# Altium PCB CP17E0276.PcbDoc (part 1 of 2)
Units mil, origin at the board's own origin, x right, y up, seen from the top; angles counter-clockwise.
Board outline 1745 x 3124.58 mil, 4 copper layers (Top Layer, Signal Layer 1, Signal Layer 2, Bottom Layer), stack 63.668 mil thick; 133 components, 83 nets, 411 pads, 139 vias.
Unrouted connection lines stored in the file: 11.
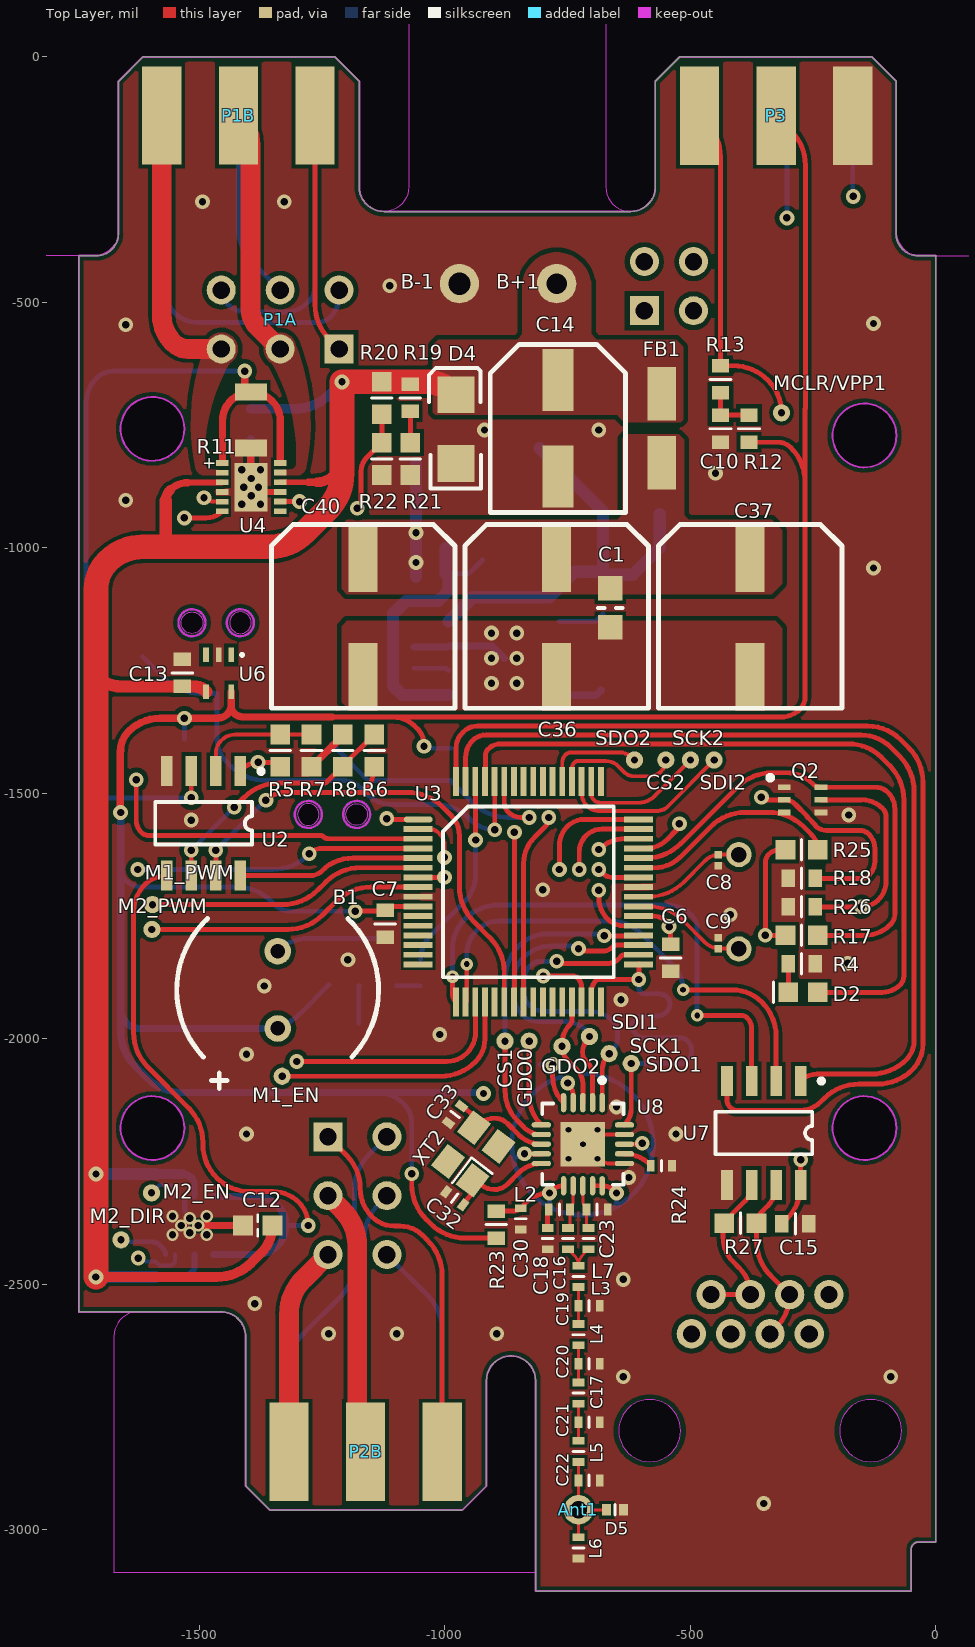
[diagram p0: Top Layer view]
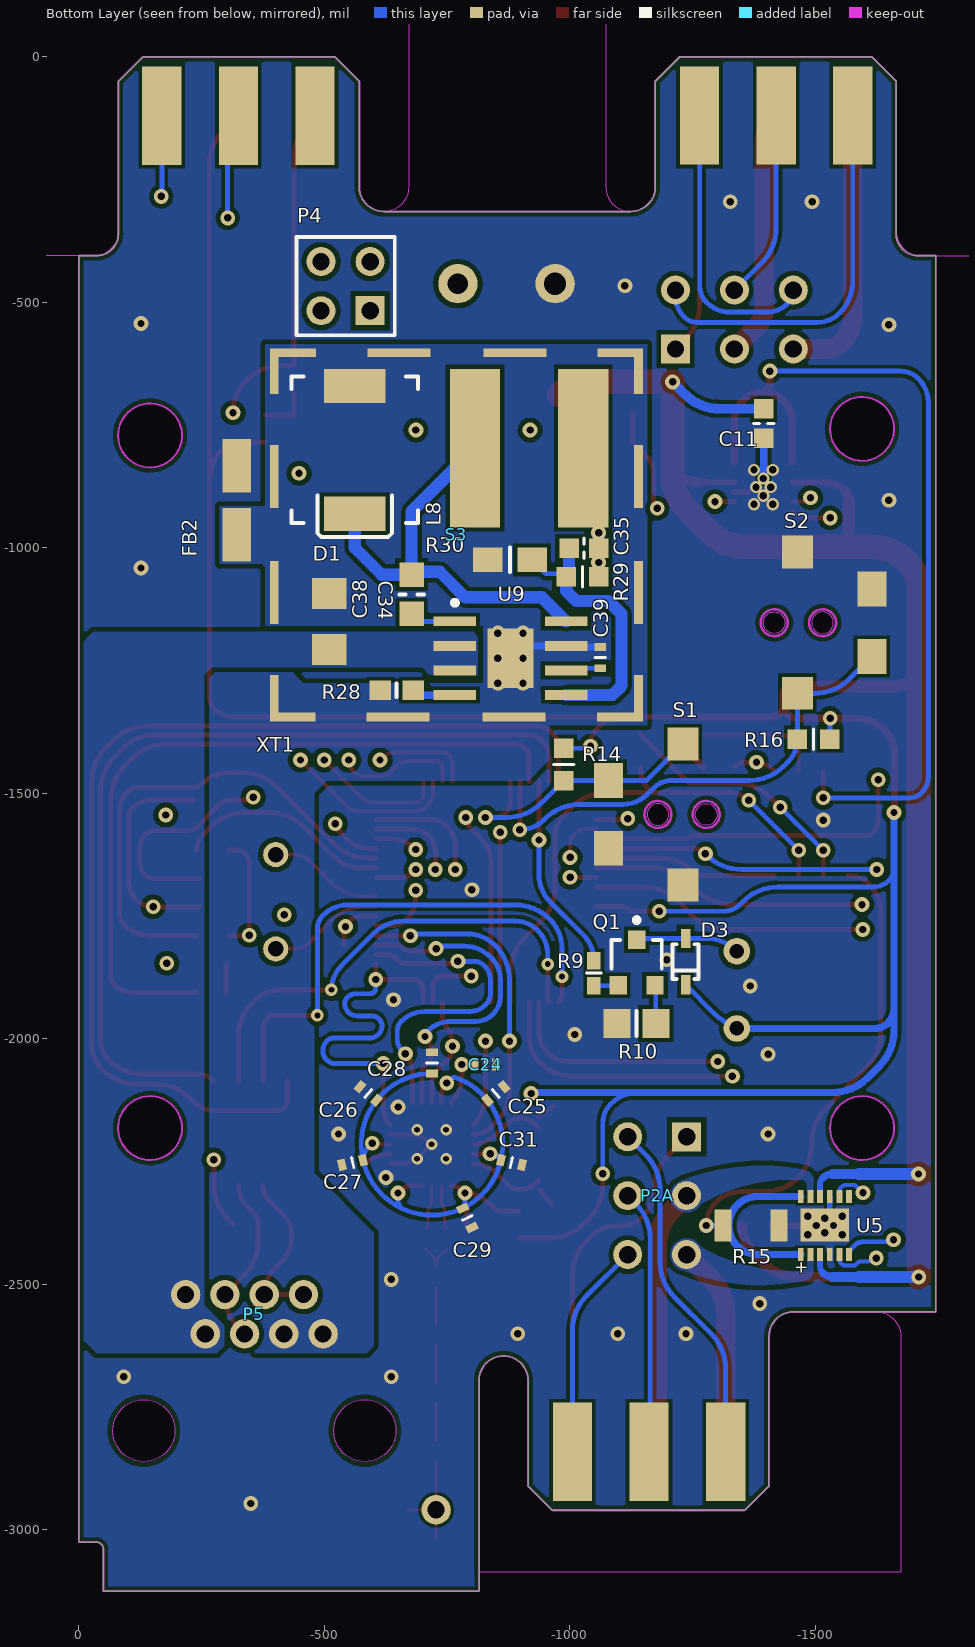
[diagram p1: Bottom Layer view, seen from below]
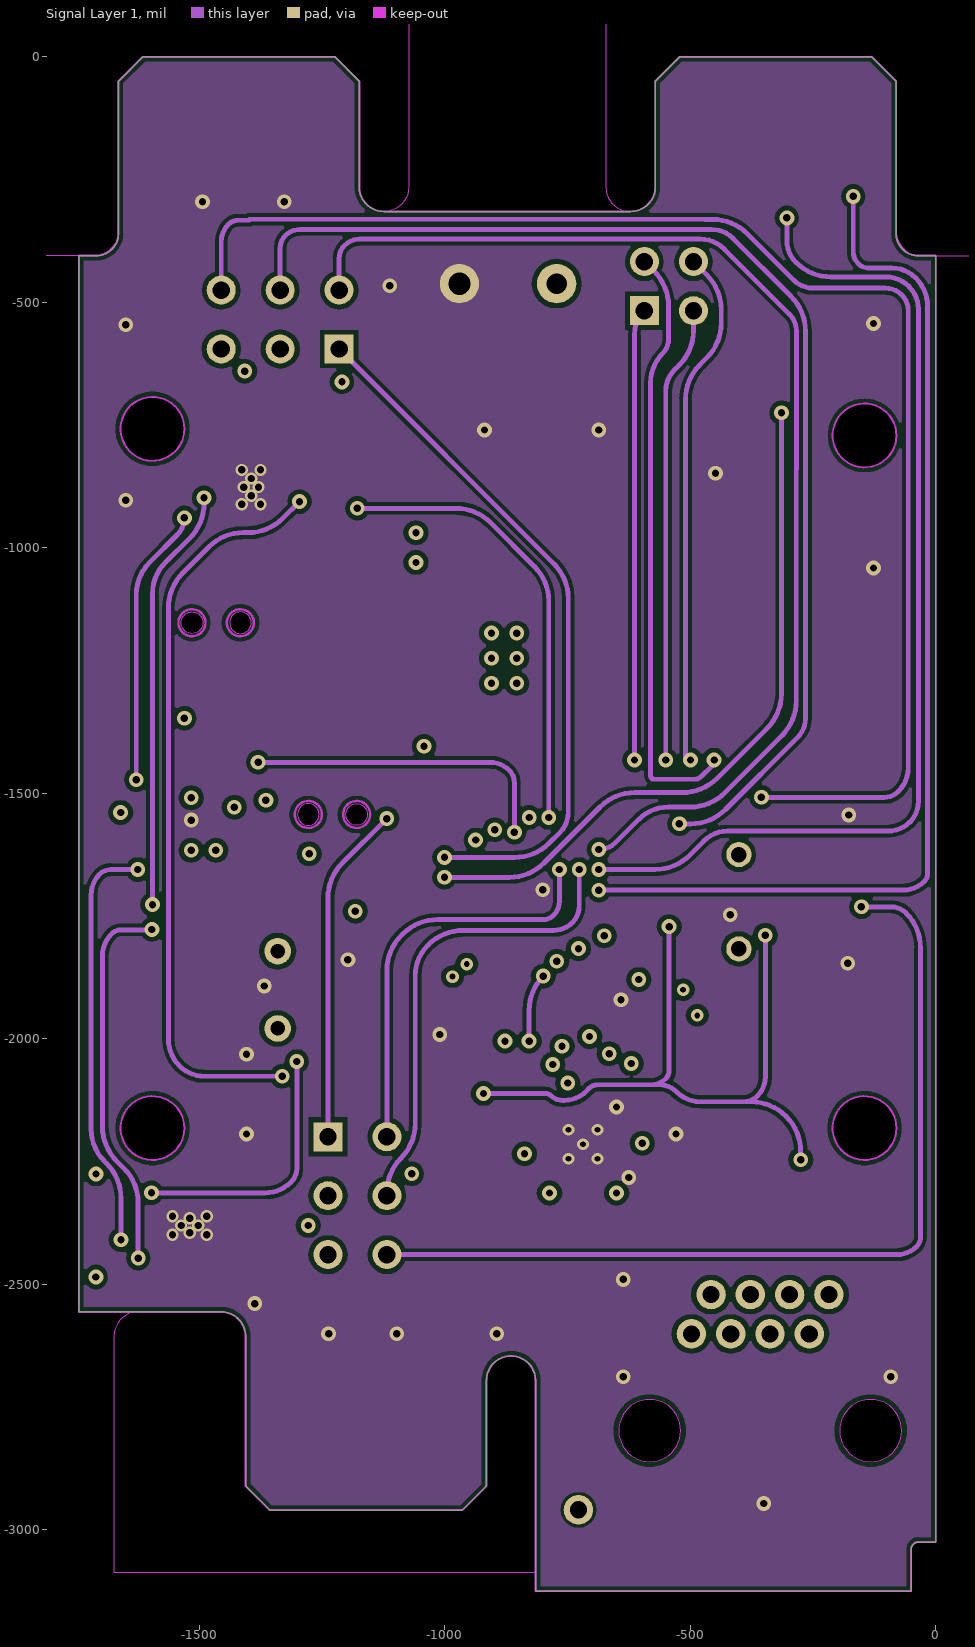
[diagram p2: Signal Layer 1]
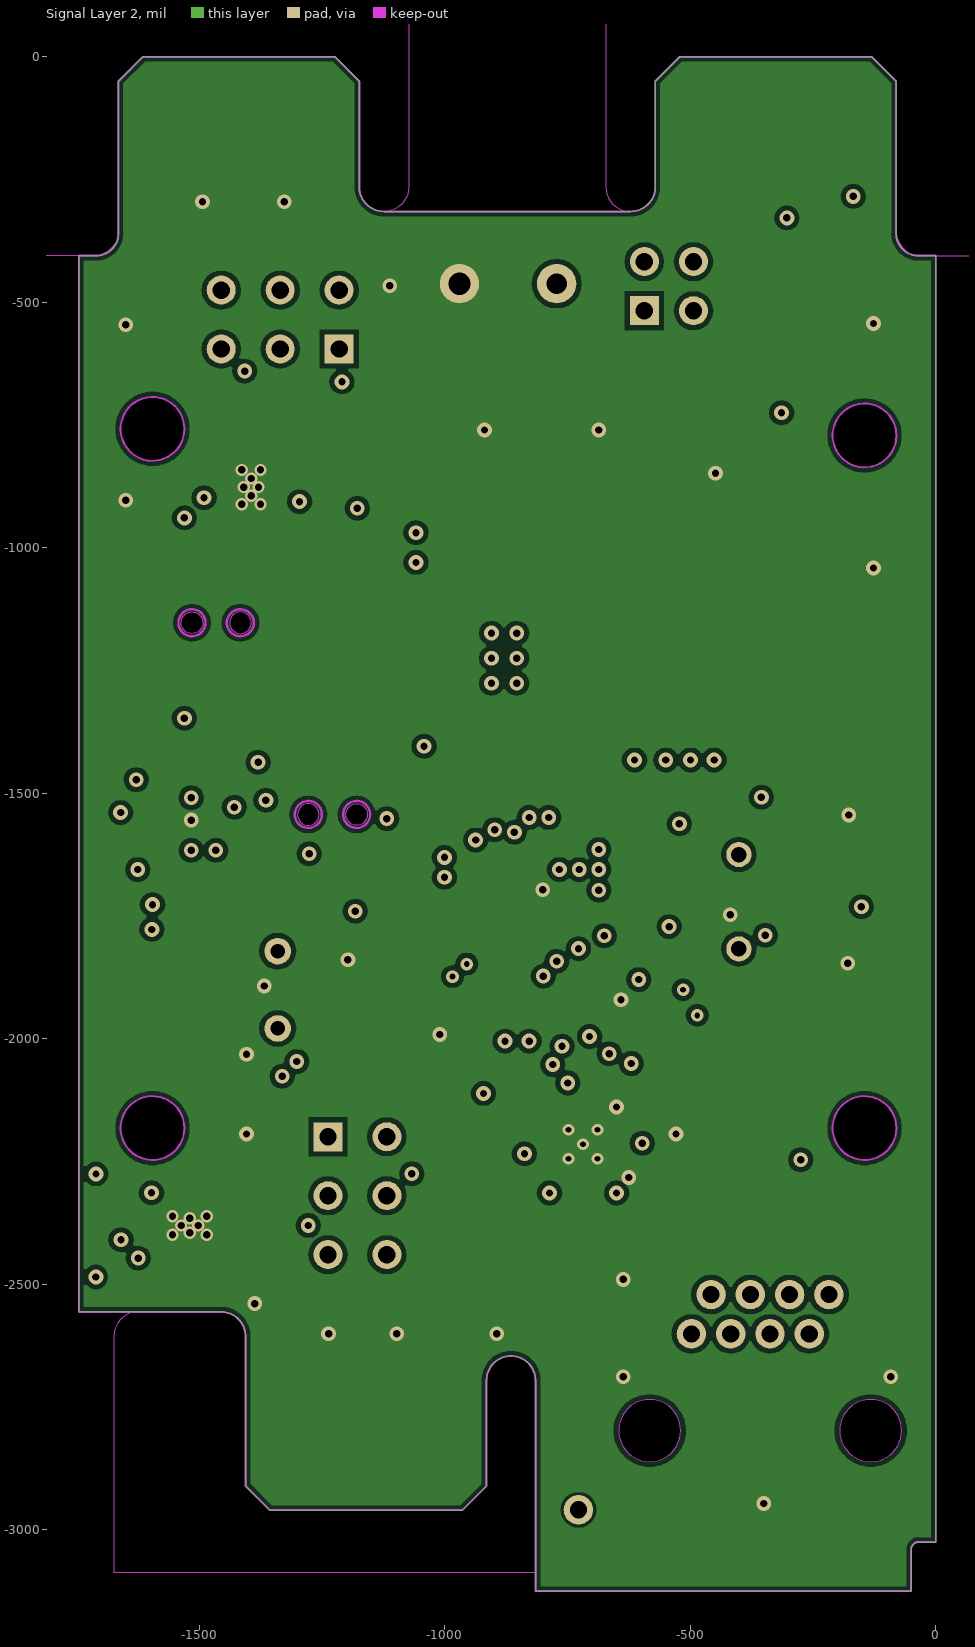
[diagram p3: Signal Layer 2]

## Layer stack, top to bottom
Top Solder: solder mask 0.4, Solder Resist, Dk 3.5
Top Layer: signal copper 1.417
Dielectric 1: prepreg 7, 2116, Dk 4.2
Signal Layer 1: signal copper 1.417
Dielectric 2: core 44, FR-4, Dk 4.2
Signal Layer 2: signal copper 1.417
Dielectric 3: prepreg 7, 2116, Dk 4.2
Bottom Layer: signal copper 1.417
Bottom Solder: solder mask 0.4, Solder Resist, Dk 3.5

## Board outline
-1745,-2555.69 -1745,-405 -1709.55,-405 ccw(c-1709.55,-359.69) -1664.23,-359.69 -1664.24,-359.69 -1664.24,-49.84 -1614.39,0 -1223.61,0 -1173.76,-49.84 -1173.76,-271.35 ccw(c-1123.5,-264.23) -1123.5,-315 -621.48,-315 ccw(c-621.48,-264.23) -571.22,-271.35 -571.22,-49.84 -521.37,0 -130.59,0 -80.75,-49.84 -80.75,-359.69 ccw(c-35.44,-359.69) -35.44,-405 0,-405 0,-3024.58 -35,-3024.58 ccw(c-35,-3039.58) -50,-3039.58 -50,-3124.58 -814.92,-3124.58 -814.92,-2695.58 ccw(c-864.92,-2695.58) -914.92,-2695.58 -914.92,-2910.58 -963.92,-2959.58 -1355.92,-2959.58 -1404.92,-2910.58 -1405.39,-2910.58 -1405.39,-2605.69 ccw(c-1455.39,-2605.69) -1455.39,-2555.69
cut-out: -1530,-2181.58 cw(c-1595,-2181.58) -1595,-2246.58 cw(c-1595,-2181.58) -1660,-2181.58 cw(c-1595,-2181.58) -1595,-2116.58 cw(c-1595,-2181.58)
cut-out: -80,-2181.58 cw(c-145,-2181.58) -145,-2246.58 cw(c-145,-2181.58) -210,-2181.58 cw(c-145,-2181.58) -145,-2116.58 cw(c-145,-2181.58)
cut-out: -1595,-692.58 cw(c-1595,-757.58) -1530,-757.58 cw(c-1595,-757.58) -1595,-822.58 cw(c-1595,-757.58) -1660,-757.58 cw(c-1595,-757.58)
cut-out: -145,-836.05 cw(c-145,-771.05) -210,-771.05 cw(c-145,-771.05) -145,-706.05 cw(c-145,-771.05) -80,-771.05 cw(c-145,-771.05)
cut-out: -645.72,-2797.58 ccw(c-582.49,-2797.58) -582.49,-2860.81 ccw(c-582.49,-2797.58) -519.26,-2797.58 ccw(c-582.49,-2797.58) -582.49,-2734.35 ccw(c-582.49,-2797.58)
cut-out: -195.71,-2797.58 ccw(c-132.48,-2797.58) -132.48,-2860.81 ccw(c-132.48,-2797.58) -69.25,-2797.58 ccw(c-132.48,-2797.58) -132.48,-2734.35 ccw(c-132.48,-2797.58)

## Design rules (kind name [scope] priority, off if disabled: settings)
Clearance Clearance_Exceptions [InComponentClass('Radio') or InComponentClass('For Pad Clearence Exemptions')] p1: gap=6
Clearance Clearance_1 [All] p2: gap=10 except(8: Arc-Arc Arc-Track Arc-SMDPad Arc-THPad Arc-Via Arc-Fill Arc-Poly Arc-Region Arc-Text Track-Track Track-SMDPad Track-Poly SMDPad-SMDPad SMDPad-THPad SMDPad-Via SMDPad-Poly THPad-THPad)
Clearance KeepOut [IsKeepOut] p3: gap=20
ComponentClearance "C1 and C36" [InComponent('C1') vs InComponent('C36')] p1: gap=-30 collisioncheckmode=3 verticalgap=100000 showdistances=FALSE
ComponentClearance ComponentClearance_1 [All] p2: gap=10 collisioncheckmode=3 verticalgap=10 showdistances=FALSE
Length Length_1 [All] p1: maxlimit=100000 minlimit=0
Length "Radio communication Length" [InNetClass('Radio Communication')] p2: maxlimit=650 minlimit=0
MatchedLengths MatchedLengths_1 [InNetClass('Radio Communication')] p1: tolerance=50 checknetsindiffpair=FALSE checkdiffpairvsdiffpair=TRUE checkxsignals=TRUE checkothers=TRUE
MaxMinImpedance [InNetClass('Ant')] p1: minimum=49.50 maximum=50.50
PolygonConnect "Buck convert" [InNet('NetC4_1') or InNet('NetC35_1') or InNet('NetC3_2') or InNet('PWRIN') or InNet('NetP1A_2') or InNet('NetP1A_3') or InNet('NetC36_2') or InNet('NetP2A_2') or InNet('NetP2A_3') or InNet('VCC') or InNet('NetC38_1')or InNet('GND') or InNet('NetC1_2') or InNet('NetC1_1')] p1: connectstyle=Direct reliefconductorwidth=10 reliefentries=4 polygonreliefangle="90 Angle" airgapwidth=10
PolygonConnect [All] p2: connectstyle=Relief reliefconductorwidth=10 reliefentries=4 polygonreliefangle="90 Angle" airgapwidth=10
PolygonConnect PolygonConnect_1 [All] p3: connectstyle=Relief reliefconductorwidth=10 reliefentries=4 polygonreliefangle="90 Angle" airgapwidth=10
RoomDefinition "Buck Converter_12v" [InComponentClass('Buck Converter_12v')] p1: confinementstyle=ConfineIn formatcopy=TRUE lockcomponents=FALSE outline -1874.46,-4406.58 2453.47,-4406.58 2453.47,415.21 -1874.46,415.21
RoomDefinition Radio [InComponentClass('Radio')] p2: confinementstyle=ConfineIn formatcopy=TRUE lockcomponents=FALSE outline -1528.5,-6085.26 -223.5,-6085.26 -223.5,-1831.75 -1528.5,-1831.75
RoomDefinition Power [InComponentClass('Power')] p3: confinementstyle=ConfineIn formatcopy=TRUE lockcomponents=FALSE outline -2319,-3567.58 4456.49,-3567.58 4456.49,137.57 -2319,137.57
RoomDefinition Main [InComponentClass('Main')] p4: confinementstyle=ConfineIn formatcopy=TRUE lockcomponents=FALSE outline -2625,-3305.58 5282.94,-3305.58 5282.94,2221.57 -2625,2221.57
RoutingVias [All] p1: holewidth=15 width=30 viastyle="Through Hole" minholewidth=15 minwidth=30 maxholewidth=15 maxwidth=30
SolderMaskExpansion [All] p1: expansion=4
Width Radio_1 [InNetClass('Radio')] p1: maxlimit=50 minlimit=6 preferedwidth=6
Width [All and not InNetClass('Radio Antenna')] p2: maxlimit=50 minlimit=8 preferedwidth=10
Width "50 Ohm Width" [InNetClass('Radio Filter')] p3 off: maxlimit=25 minlimit=4 preferedwidth=8 impedancedriven=TRUE minimp=49.500000 maximp=50.500000 favimp=50.000000
29 further rules are at their usual default settings.

## Classes and differential pairs
net class "Radio Antenna": NetAnt1_1 NetC16_1 NetC16_2 NetC17_1 NetC17_2 NetC19_1 NetC23_1
net class "Radio Communication": NetC17_1 NetC19_1 NetCS1_0 NetSCK1_0 NetSDI1_0 NetSDO1_0
component class "For Pad Clearence Exemptions": U3 U4 U5
component class Radio: Ant1 C16 C17 C18 C19 C20 C21 C22 C23 C24 C25 C26 C27 C28 C29 C30 C31 C32 C33 D5 L2 L3 L4 L5 L6 L7 R23 R24 U8 XT2
component class Power: B+1 B-1 C13 C14 C15 D4 P5 R19 R20 R21 R22 R27 S3 U6 U7
component class Main: B1 BAT C6 C7 C8 C9 C10 C11 C12 CS1 CS2 D2 D3 DOWN GDO0 GDO2 M1 M1_DIR M1_EN M1_ID M1_PWM M1H1 M1H2 M1HP M2 M2_DIR M2_EN M2_ID M2_PWM M2H1 M2H2 M2HP MCLR/VPP1 P1A P1B P2A P2B P3 P4 Q1 Q2 R4 R5 R6 R7 R8 R9 R10 R11 R12 R13 R14 R15 R16 R17 R18 R25 R26 S1 S2 SCK1 SCK2 SDI1 SDI2 SDO1 SDO2 U2 U3 U4 U5 UP XT1
component class "Buck Converter_12v": C1 C34 C35 C36 C37 C38 C39 C40 D1 FB1 FB2 L8 R28 R29 R30 U9

## Components (designator, comment, footprint, x,y, rotation, side; value= is the part's Value field where it differs from the comment)
Ant1 "Antenna" "35 mil hole" -727.5,-2958.95 r90 top
B1 "Buzzer" CST-931AP -1340.12,-1900 r0 top
B+1 "Batt +" "45 mil hole"#1 -771.97,-462 r0 top
B-1 "Batt -" "45 mil hole"#2 -970,-462 r0 top
BAT "" TestPoint1 4573.28,-3065.68 r90 top
C1 "10uF" "0805 capacitor" -662.78,-1082 r270 top
C6 "0.1uF" "0603 Small" -540,-1835 r90 top
C7 "1.0uF" "0603 Small" -1121.36,-1765.48 r90 top
C8 "22pF" 0201 -442.73,-1636.11 r90 top
C9 "22pF" 0201 -442.73,-1805.11 r270 top
C10 "0.1uF" "0603 Small" -438.23,-757.33 r90 top
C11 "0.1uF" "0603 Capacitor" -1394.54,-746.78 r90 bottom
C12 "0.1uF" "0603 Capacitor" -1380.62,-2379.95 r0 top
C13 "0.1uF" "0603 Small" -1534.04,-1254.62 r90 top
C14 "100uF" ALEL_D8 -769.3,-756.54 r270 top
C15 "0.1uF" "0603 Small" -285.65,-2376.52 r180 top
C16 "3.9pF" "0402 Small" -748.79,-2406.63 r90 top
C17 "220pF" "0402 Small" -727.5,-2721.09 r270 top
C18 "220pF" "0402 Small" -790.42,-2406.63 r90 top
C19 "8.2pF" "0402 Small" -705.85,-2543.04 r0 top
C20 "5.6pF" "0402 Small" -705.85,-2661.74 r0 top
C21 "NP" "0402 Small" -705.85,-2780.44 r0 top
C22 "NP" "0402 Small" -705.85,-2899.13 r0 top
C23 "3.9pF" "0402 Small" -689.44,-2347.28 r0 top
C24 "100nF" "0402 Small" -828,-2052.09 r0 bottom
C25 "22nF" "0402 Small" -848.99,-2111.17 r321.43 bottom
C26 "22nF" "0402 Small" -589.39,-2111.17 r218.57 bottom
C27 "22nF" "0402 Small" -557.39,-2251.57 r167.14 bottom
C28 "22nF" "0402 Small" -719.19,-2048.67 r270 bottom
C29 "22nF" "0402 Small" -791.19,-2364.27 r64.29 bottom
C30 "22nF" "0402 Small" -845.45,-2366.19 r90 top
C31 "22nF" "0402 Small" -880.99,-2251.57 r12.86 bottom
C32 "12pF" "0402 Small" -979.8,-2324.63 r322.62 top
C33 "15pF" "0402 Small" -978.85,-2153.79 r52.62 top
C34 "0.1uF" "0805 capacitor" -677.58,-1054.58 r270 bottom
C35 "560pF" "0603 Capacitor" -1028.42,-1000.56 r0 bottom
C36 "270uF" APXG160ARA271MH70G -771.97,-1139.57 r0 top
C37 "270uF" APXG160ARA271MH70G -377.95,-1139.57 r0 top
C38 "1uF" "1206 - duplicate" -510,-1150 r90 bottom
C39 "8.2nF" "0402 Small" -1062.1,-1223.39 r90 bottom
C40 "270uF" APXG160ARA271MH70G -1166,-1139.57 r0 top
CS1 "" TestPoint1 -877.06,-2004.43 r90 top
CS2 "" TestPoint1 -549.69,-1432 r90 top
D1 "STPS2L30A" SMC -562,-800.23 r270 bottom
D2 "BLUE" "0603 LED" -270,-1905.04 r180 top
D3 "" "SOD-323, SD-76" -1235.7,-1842.54 r90 bottom
D4 "SMAJ20" sma+ -977.05,-758.04 r90 top
D5 "ESD" XDFN2 -653.24,-2958.95 r180 top
DOWN "" TestPoint1 3394.28,-3065.68 r90 top
FB1 "Ferrite 0.75mOhm" "2-SMD, J-LEAD" -558.16,-756.54 r90 top
FB2 "Ferrite 0.75mOhm" "2-SMD, J-LEAD" -321.55,-903 r90 bottom
GDO0 "" TestPoint1 -828.06,-2004.43 r90 top
GDO2 "" TestPoint1 -761,-2015.05 r90 top
L2 "27nH" "0402 Small" -766.5,-2347.28 r0 top
L3 "22nH" "0402 Small" -727.5,-2483.69 r270 top
L4 "27nH" "0402 Small" -727.5,-2602.39 r270 top
L5 "NP" "0402 Small" -727.5,-2839.78 r270 top
L6 "Inductor" "0402 Small" -727.5,-3036.49 r90 top
L7 "27nH" "0402 Small" -707.15,-2406.63 r270 top
L8 "3.3uH" "SRN8040 - Power Inductor" -917,-796.73 r180 bottom
M1 "" TestPoint1 4423.28,-3065.68 r0 top
M1_DIR "" TestPoint1 1064.28,-3075.68 r90 top
M1_EN "" TestPoint1 -1331,-2076 r90 top
M1_ID "" TestPoint1 1794.28,-3075.68 r90 top
M1_PWM "" TestPoint1 -1595,-1726.46 r90 top
M1H1 "" TestPoint1 2404.28,-3065.68 r90 top
M1H2 "" TestPoint1 2124.28,-3065.68 r90 top
M1HP "" TestPoint1 3973.28,-3065.68 r90 top
M2 "" TestPoint1 4253.28,-3065.68 r0 top
M2_DIR "" TestPoint1 -1659.12,-2409 r90 top
M2_EN "" TestPoint1 -1597,-2313.49 r90 top
M2_ID "" TestPoint1 1454.28,-3075.68 r90 top
M2_PWM "" TestPoint1 -1596.18,-1777 r90 top
M2H1 "" TestPoint1 2954.28,-3065.68 r90 top
M2H2 "" TestPoint1 2664.28,-3065.68 r90 top
M2HP "" TestPoint1 3683.28,-3065.68 r90 top
MCLR/VPP1 "" TestPoint1 -314,-724.89 r90 top
P1A "M1" "2X3 Header (For track drapery)" -1335,-535 r180 top
P1B "Header 6" "Track Edge Connector"#1 -1173.82,-49.84 r180 top locked
P2A "M2a" "2X3 Header (For track drapery)" -1177.67,-2319.21 r270 bottom
P2B "Header 6" "Track Edge Connector"#2 -914.92,-2910.58 r180 top locked
P3 "Header 6" "Track Edge Connector"#2 -571.16,-49.9 r0 top locked
P4 "SPI2" HDR2X2 -593.25,-517 r90 bottom
P5 "RJ45" "RJ45 Modular Connector 8p8c" -660,-3189.58 r180 bottom locked
Q1 "NPN" "SOT23 - duplicate" -1136,-1844.51 r180 bottom
Q2 "Dual BJT" SOT-363 -271,-1513 r90 top
R4 "430Ω" "0603 Small" -273,-1847.03 r0 top
R5 "1MΩ" "0603 Resistor" -1335,-1413 r90 top
R6 "1MΩ" "0603 Resistor" -1143.55,-1413 r90 top
R7 "100KΩ" "0603 Resistor" -1271.18,-1413 r270 top
R8 "100KΩ" "0603 Resistor" -1207.37,-1413 r90 top
R9 "180Ω" "0402 Resistor" -1048.87,-1866.16 r270 bottom
R10 "12Ω" 6-0805_M -1135.57,-1968.66 r180 bottom
R11 ".1Ω" "1206 Small" -1394.54,-739.78 r270 top
R12 "10KΩ" "0603 Small" -380.22,-757.33 r270 top
R13 "470Ω" "0603 Small" -438.23,-656.64 r270 top
R14 "1MΩ" "0603 Resistor" -987.35,-1440.98 r90 bottom
R15 ".1Ω" "1206 Small" -1368.95,-2379.95 r180 bottom
R16 "1MΩ" "0603 Resistor" -1496.3,-1389.6 r0 bottom
R17 "1MΩ" "0603 Resistor" -273,-1789.02 r180 top
R18 "33KΩ" "0603 Small" -273,-1673 r0 top
R19 "24V" "0603 Small" -1069.99,-694.62 r90 top
R20 "9.1MΩ" "0603 Resistor" -1128,-694.62 r270 top
R21 "9.1MΩ" "0603 Resistor" -1069.99,-818.63 r270 top
R22 "1MΩ" "0603 Resistor" -1128,-818.63 r270 top
R23 "10Ω" "0603 Small" -895.27,-2378 r90 top
R24 "56KΩ" "0402 Small" -558.49,-2257.95 r0 top
R25 "1MΩ" "0603 Resistor" -273,-1614.99 r0 top
R26 "33KΩ" "0603 Small" -273,-1731.01 r180 top
R27 "110Ω" "0603 Resistor" -398,-2375 r180 top
R28 "20.5KΩ" 0603 -647,-1289.89 r180 bottom
R29 "150KΩ" "0603 resistor" -1025.42,-1058.73 r180 bottom
R30 "10KΩ" 0805 -833,-1024.56 r180 bottom
S1 "Side Actuated Switch" HDP001L -1277.7,-1542.88 r270 bottom
S2 "Side Actuated Switch" HDP001L -1416.06,-1152.43 r90 bottom
S3 "" SMS-1020 -1140,-602.73 r0 bottom locked
SCK1 "" TestPoint1 -665,-2030.05 r90 top
SCK2 "" TestPoint1 -499.5,-1432 r90 top
SDI1 "" TestPoint1 -705,-1995.05 r90 top
SDI2 "" TestPoint1 -451.33,-1432 r90 top
SDO1 "" TestPoint1 -620,-2050.05 r90 top
SDO2 "" TestPoint1 -613.4,-1432 r90 top
U2 "TS27L2" SOIC-8 -1491,-1561 r270 top
U3 "PIC18F66K40" 64TQFP -1053.82,-1552.88 r0 top locked
U4 "MOTOR 1" TD1233#1 -1394.07,-876.21 r0 top
U5 "MOTOR 2" TD1233#2 -1519.29,-2379.95 r90 bottom
U6 "3.3V" SC70_5 -1434.57,-1217.9 r270 top
U7 "RS485 Transceiver" SOIC-8 -350,-2191.58 r270 top
U8 "CC110L" VQFN-20 -718.54,-2214.37 r270 top
U9 "LMR14050SDDAR" "SO8 - GROUND PAD" -879,-1224.74 r180 bottom
UP "" TestPoint1 3224.28,-3065.68 r0 top
XT1 "Crystal 2 Pin" HC-49S -400.94,-1815.61 r90 bottom
XT2 "26MHz" CFPX-5 -941.68,-2234.2 r52.62 top

## Footprints (in the part's own frame and the unit in brackets; to place one, negate y for a bottom-side part, rotate by r counter-clockwise, add the part's x,y. Pads: shape width x height; smd on the part's side, far side on the other; paste and mask are expansions set on the pad)
"2-SMD, J-LEAD" [mil]
  rect 109x58 smd: 1(-70.5,0) 2(70.5,0)
  body extent -83,-61 83,61, height 120
"2X3 Header (For track drapery)" [mm]
  rect 1.5x1.5 hole 0.9: 1(-3.048,1.524)
  round 1.5 hole 0.9: 2(0,1.524) 3(3.048,1.524) 4(-3.048,-1.524) 5(0,-1.524) 6(3.048,-1.524)
6-0805_M [mm] "Chip Resistor, Body 2.0x1.2mm, IPC Low Density"
  rect 1.4x1.5 smd: 1(-1,0) 2(1,0)
  silkscreen extent 0,-0.65 0,0.65, body extent -1.07,-0.7 1.07,0.7, height 0.7
"35 mil hole" [mil]
  round 60 hole 35: 1(0,0)
  body extent -16,-16 16,16, height 50
"45 mil hole"#1 [mil]
  round 80 hole 42: 1(0,0)
  body extent -16,-16 16,16, height 50
"45 mil hole"#2 [mil]
  round 80 hole 45: 1(0,0)
  body extent -16,-16 16,16, height 50
64TQFP [mm] "PIC18F66K40-I/PT"
  oval 1.5x0.3 smd: 1(0,0)
  rect 1.5x0.3 smd: 2(0,-0.5) 3(0,-1) 4(0,-1.5) 5(0,-2) 6(0,-2.5) 7(0,-3) 8(0,-3.5) 9(0,-4) 10(0,-4.5) 11(0,-5) 12(0,-5.5) 13(0,-6) 14(0,-6.5) 15(0,-7) 16(0,-7.5) 33(11.4,-7.5) 34(11.4,-7) 35(11.4,-6.5) 36(11.4,-6) 37(11.4,-5.5) 38(11.4,-5) 39(11.4,-4.5) 40(11.4,-4) 41(11.4,-3.5) 42(11.4,-3) 43(11.4,-2.5) 44(11.4,-2) 45(11.4,-1.5) 46(11.4,-1) 47(11.4,-0.5) 48(11.4,0)
  rect 0.3x1.5 smd: 17(1.95,-9.45) 18(2.45,-9.45) 19(2.95,-9.45) 20(3.45,-9.45) 21(3.95,-9.45) 22(4.45,-9.45) 23(4.95,-9.45) 24(5.45,-9.45) 25(5.95,-9.45) 26(6.45,-9.45) 27(6.95,-9.45) 28(7.45,-9.45) 29(7.95,-9.45) 30(8.45,-9.45) 31(8.95,-9.45) 32(9.45,-9.45) 49(9.45,1.95) 50(8.95,1.95) 51(8.45,1.95) 52(7.95,1.95) 53(7.45,1.95) 54(6.95,1.95) 55(6.45,1.95) 56(5.95,1.95) 57(5.45,1.95) 58(4.95,1.95) 59(4.45,1.95) 60(3.95,1.95) 61(3.45,1.95) 62(2.95,1.95) 63(2.45,1.95) 64(1.95,1.95)
  silkscreen extent 1.28,-8.16 10.11,0.67
0201 [mil]
  rect 15x16 smd: 1(-11.5,0) 2(11.5,0)
"0402 Resistor" [mm]
  rect 0.9x0.7 smd: 1(-0.65,0) 2(0.65,0)
  silkscreen extent 0,-0.38 0,0.38, body extent -0.52,-0.27 0.53,0.28, height 0.25
"0402 Small" [mm]
  rect 0.4x0.6 smd: 1(-0.55,0) 2(0.55,0)
  silkscreen extent 0,-0.27 0,0.28, body extent -0.52,-0.27 0.53,0.28, height 0.25
0603 [mm]
  rect 1.1x1 smd: 1(-0.838,0) 2(0.862,0)
  silkscreen extent 0,-0.36 0,0.36, body extent -0.77,-0.38 0.77,0.38, height 0.51
"0603 Capacitor" [mil]
  rect 40x40 smd: 1(-30,0) 2(30,0)
  silkscreen extent 0,-21 0,21, body extent -30,-15 31,15, height 20
"0603 LED" [mil]
  rect 40x40 smd: 1(-30,0) 2(30,0)
  silkscreen extent 60,-21 60,21, body extent -31,-16 31,16, height 37
"0603 Resistor" [mil]
  rect 40x40 smd: 1(-33,0) 2(33,0)
  silkscreen extent 0,-21 0,21, body extent -30,-15 31,15, height 20
"0603 resistor" [mil]
  rect 40x40 smd: 1(-33,0) 2(33,0)
  silkscreen extent 0,-21 0,21, body extent -30,-15 31,15, height 20
"0603 Small" [mm]
  rect 0.7x0.9 smd: 1(-0.7,0) 2(0.7,0)
  silkscreen extent 0,-0.53 0,0.53, body extent -0.77,-0.38 0.77,0.38, height 0.51
0805 [mil]
  rect 60x50 smd: 1(0,0) 2(90,0)
  silkscreen extent 45,-25 45,25, body extent 5,-25 85,25, height 25
"0805 capacitor" [mil]
  rect 50x50 smd: 1(0,0) 2(80,0)
  silkscreen extent 40,-25 40,25, body extent 0,-25 80,25, height 25
"1206 - duplicate" [mil]
  rect 63x70 smd: 1(-57,0) 2(57,0)
  body extent -60,-30 61,30, height 30
"1206 Small" [mil]
  rect 35x65 smd: 1(-57,0) 2(57,0)
  body extent -60,-30 61,30, height 30
ALEL_D8 [mm]
  rect 3.2x1.6 smd: 1(-2.5,0) 2(2.5,0)
  silkscreen extent -4.34,-3.5 4.34,3.5, body extent -4.34,-3.51 4.24,3.51, height 8.25
APXG160ARA271MH70G [mm] "CAP ALUM POLY 270UF 20% 16V SMD"
  rect 1.5x3.5 smd: 1(0,3.022) 2(0,-3.128)
  silkscreen extent -4.75,-4.75 4.75,4.75, body extent -4.25,-4.25 4.25,4.25, height 7.01
CFPX-5 [mm]
  rect 1.4x1.15 smd: 1(-1.1,-0.8) 2(1.1,-0.8) 3(1.1,0.8) 4(-1.1,0.8)
  silkscreen extent -1.84,-1.41 -0.21,-0.04, body extent -1.22,-1 1.3,1, height 0.56
CST-931AP [mm] "AUDIO MAGNETIC XDCR 9mm"
  round 1.375 hole 0.75: 1(0,-2) 2(0,2)
  silkscreen extent -5.22,-5.11 5.22,3.68, body extent -4.52,-4.5 4.47,4.5, height 4.5
HC-49S [mm]
  round 1.3 hole 0.811: 1(-0.025,0) 2(4.851,0)
  body extent -3.37,-2.59 8.2,2.52, height 3.8
HDP001L [mm] "Switch - Angled Toggle Left"
  rect 1.8x1.5 smd: 0(-1.75,-5.05) 3(1.75,-5.05)
  rect 1.7x1.6 smd: 1(-3.65,-1.2) 2(3.65,-1.2)
  Keep-Out Layer circle w0.125: c0,0 r0.7
  Keep-Out Layer circle w0.125: c0,-2.502 r0.7
  Keep-Out Layer board cut-out: -0.559,-2.502 -0.484,-2.781 -0.279,-2.986 0,-3.061 0,-3.061 0.214,-3.018 0.395,-2.897 0.516,-2.716 0.559,-2.502 0.559,-2.502 0.516,-2.288 0.395,-2.107 0.214,-1.986 0,-1.943 0,-1.943 -0.279,-2.018 -0.484,-2.222 -0.559,-2.502
  Keep-Out Layer board cut-out: 0,-0.559 -0.214,-0.516 -0.395,-0.395 -0.516,-0.214 -0.559,0 -0.559,0 -0.516,0.214 -0.395,0.395 -0.214,0.516 0,0.559 0,0.559 0.214,0.516 0.395,0.395 0.516,0.214 0.559,0 0.559,0 0.516,-0.214 0.395,-0.395 0.214,-0.516 0,-0.559
  body extent -3.75,-5.45 3.7,3.2, height 1.9
HDR2X2 [mm] "Connector; Header; 4x2 Position"
  rect 1.5x1.5 hole 0.9: 1(0,0)
  round 1.5 hole 0.9: 2(0,2.54) 3(2.54,0) 4(2.54,2.54)
  silkscreen extent -1.27,-1.27 3.81,3.81
"RJ45 Modular Connector 8p8c" [mil]
  round 60 hole 35: 1(-202.5,669) 2(-282.5,669) 3(-362.5,669) 4(-442.5,669) 5(-402.5,589) 6(-322.5,589) 7(-242.5,589) 8(-162.5,589)
  body extent -610,-5 5,820, height 535
SC70_5 [mm]
  rect 0.75x0.3 smd: 1(0,0) 2(0,-0.65) 3(0,-1.3) 4(1.9,-1.3) 5(1.9,0)
  silkscreen extent -0.08,0.48 0.08,0.64, body extent 0.3,-1.66 1.54,0.34, height 1.07
sma+ [mil]
  rect 75x75 smd: 1(-70,0) 2(70,0)
  silkscreen extent -121,-51 124,55, body extent -95,-50 95,50, height 90
SMC [mil]
  rect 70x125 smd: 1(-130,0) 2(130,0)
  silkscreen extent -149,-129 178,129, body extent -160,-120 160,120, height 100
SMS-1020 [mil] "Emi shield for track drapery buck converter"
  rect 18x93 smd: 1(0,37.5) 1(742,37.5)
  rect 18x128 smd: 1(0,252) 1(0,488) 1(742,252) 1(742,488)
  rect 18x95 smd: 1(0,703.5) 1(742,703.5)
  rect 93x18 smd: 1(37.5,0) 1(38.5,742) 1(703.5,0) 1(704.5,742)
  rect 128x18 smd: 1(252,0) 1(254,742) 1(488,0) 1(490,742)
  body extent -4,-4 746,746, height 200
"SO8 - GROUND PAD" [mm]
  rect 2.2x0.5 smd: 1(-2.875,1.905) 2(-2.875,0.635) 3(-2.875,-0.635) 4(-2.875,-1.905) 5(2.875,-1.905) 6(2.875,-0.635) 7(2.875,0.635) 8(2.875,1.905)
  rect 2.4x3.1 smd mask+0: 9(0,0)
  silkscreen extent -3,2.74 -2.75,3, body extent -2.13,-2.63 2.13,2.63, height 1.7
"SOD-323, SD-76" [mm]
  rect 1x0.5 smd: 1(1.2,0) 2(-1.2,0)
  silkscreen extent -0.9,-0.67 0.9,0.67, body extent -1.35,-0.67 1.35,0.68, height 1.1
SOIC-8 [mm]
  rect 1.55x0.6 smd: 1(-2.7,1.905) 2(-2.7,0.635) 3(-2.7,-0.635) 4(-2.7,-1.905) 5(2.7,-1.905) 6(2.7,-0.635) 7(2.7,0.635) 8(2.7,1.905)
  silkscreen extent -2.81,-2.5 1.1,3.09, body extent -1.91,-2.54 1.91,2.54, height 1.52
"SOT23 - duplicate" [mm] "SOT-23; 3 Leads; Body 3.1 x 2.5 mm, inc. leads (LxW max), Alternate Lead Configuration"
  rect 0.9x0.95 smd: 1(0,1.175) 2(0.95,-1.175) 3(-0.95,-1.175)
  silkscreen extent -1.3,-0.3 1.3,2.32, body extent -1.45,-1.4 1.45,1.4, height 1.02
SOT-363 [mm]
  rect 0.3x0.66 smd: 1(0.65,0.95) 2(0,0.95) 3(-0.65,0.95) 4(-0.65,-0.95) 5(0,-0.95) 6(0.65,-0.95)
  silkscreen extent 1.02,1.55 1.27,1.8, body extent -1.13,-0.75 1.13,0.75, height 0.9
"SRN8040 - Power Inductor" [mm]
  rect 2.6x8.2 smd: 1(-2.8,0) 2(2.8,0)
  body extent -4.2,-4.2 4.2,4.2, height 3.99
TD1233#1 [mm] "Maxim Integrated TDFN 12 lead 3x3 package"
  rect 1.7x2.5 smd mask+0: 0(0,0)
  rect 0.65x0.3 smd mask+0: 1(-1.499,1.246) 2(-1.499,0.746) 3(-1.499,0.246) 4(-1.499,-0.254) 5(-1.499,-0.754) 6(-1.499,-1.254) 7(1.5,-1.25) 8(1.5,-0.75) 9(1.5,-0.25) 10(1.5,0.25) 11(1.5,0.75) 12(1.5,1.25)
  Top Layer lines w0.254: 0.762,-0.254 cw(c0.772,-0.264) 0.772,-0.25
  Top Layer lines w0.3: 0.772,-0.25 1.5,-0.25
TD1233#2 [mm] "Maxim Integrated TDFN 12 lead 3x3 package"
  rect 1.7x2.5 smd mask+0: 0(0.024,0)
  rect 0.65x0.3 smd mask+0: 1(-1.499,1.246) 2(-1.499,0.746) 3(-1.499,0.246) 4(-1.499,-0.254) 5(-1.499,-0.754) 6(-1.499,-1.254) 7(1.5,-1.25) 8(1.5,-0.75) 9(1.5,-0.25) 10(1.5,0.25) 11(1.5,0.75) 12(1.5,1.25)
  Top Layer lines w0.254: 0.762,-0.254 cw(c0.772,-0.264) 0.772,-0.25
  Top Layer lines w0.3: 0.772,-0.25 1.5,-0.25
TestPoint1 [mil] "Round test point 60mil"
  round 35 smd: 0(0,0)
  body extent -15,-15 15,15
"Track Edge Connector"#1 [mil]
  rect 80x200 smd: 1(90.25,69.89) 2(246.23,69.89) 3(402.22,69.89)
  rect 80x200 smd far side: 4(402.22,69.89) 5(246.23,69.89) 6(90.25,69.89)
  Keep-Out Layer board cut-out: -100.53,-175.11 -100.53,214.89 -95.55,236.7 -81.6,254.19 -61.45,263.89 -39.08,263.89 -18.93,254.19 -4.98,236.7 0,214.89 0,214.89 0,0 49.84,-49.84 440.63,-49.84 490.47,0 490.47,304.89 494.3,324.13 505.19,340.43 521.5,351.33 540.73,355.16 540.73,355.16 708.67,355.16 727.91,351.33 744.21,340.43 755.11,324.13 758.94,304.89 758.94,304.89 758.94,-175.11 758.92,-175.21 758.86,-175.3 758.77,-175.35 758.67,-175.37 758.67,-175.37 -100.27,-175.37 -100.37,-175.35 -100.45,-175.3 -100.51,-175.21 -100.53,-175.11
"Track Edge Connector"#2 [mil]
  rect 80x200 smd: 1(90.25,-69.89) 2(246.24,-69.89) 3(402.22,-69.89)
  rect 80x200 smd far side: 4(402.22,-69.89) 5(246.24,-69.89) 6(90.25,-69.89)
  Keep-Out Layer board cut-out: -100.53,175.11 -100.53,-214.89 -95.55,-236.7 -81.6,-254.19 -61.45,-263.89 -39.08,-263.89 -18.93,-254.19 -4.98,-236.7 0,-214.89 0,-214.89 0,0 49.84,49.84 440.63,49.84 490.47,0 490.47,-304.89 494.3,-324.13 505.19,-340.43 521.5,-351.33 540.74,-355.16 540.74,-355.16 708.67,-355.16 727.91,-351.33 744.21,-340.43 755.11,-324.13 758.94,-304.89 758.94,-304.89 758.94,175.11 758.92,175.21 758.86,175.3 758.77,175.35 758.67,175.37 758.67,175.37 -100.26,175.37 -100.37,175.35 -100.45,175.3 -100.51,175.21 -100.53,175.11
VQFN-20 [mm] "VQFN 20 pin 50"
  oval 1x0.28 smd mask+0.07: 1(-2.15,1) 2(-2.15,0.5) 3(-2.15,0) 4(-2.15,-0.5) 5(-2.15,-1) 11(2.15,-1) 12(2.15,-0.5) 13(2.15,0) 14(2.15,0.5) 15(2.15,1)
  oval 0.28x1 smd mask+0.07: 6(-1,-2.15) 7(-0.5,-2.15) 8(0,-2.15) 9(0.5,-2.15) 10(1,-2.15) 16(1,2.15) 17(0.5,2.15) 18(0,2.15) 19(-0.5,2.15) 20(-1,2.15)
  rect 2.3x2.3 smd mask+0: 21(0,0)
  silkscreen extent -3.43,-2.1 2.1,2.1, body extent -2.01,-2.01 1.99,1.99, height 0.92
XDFN2 [mm]
  rect 0.47x0.6 smd: 1(-0.432,0) 2(0.432,0)
  silkscreen extent 0,-0.27 0,0.28, body extent -0.52,-0.27 0.53,0.28, height 0.25

## Part data
Ant1: "6.8\" Whip Antenna"
B1: "AUDIO MAGNETIC XDCR 2-4V TH"
B+1: library part Motor+Term, "7055 Series, Two Inches in length"
B-1: library part Motor-Term, "7055 Series, Two Inches in length"
BAT CS1 CS2 DOWN GDO0 GDO2 M1 M1_DIR M1_EN M1_ID M1_PWM M1H1 M1H2 M1HP M2 M2_DIR M2_EN M2_ID M2_PWM M2H1 M2H2 M2HP MCLR/VPP1 SCK1 SCK2 SDI1 SDI2 SDO1 SDO2 UP: library part "TEST POINT"
C1: library part Cap, "10µF ±10% 16V Ceramic Capacitor X5R 0805 (2012 Metric)"
C6 C10 C13 C15: library part CAP, "CAP CER 0.1UF 50V 10% X7R 0603"
C7: library part CAP, "CAP CER 1UF 50V 10% X5R 0603"
C8 C9: library part CAP, "CAP CER 22PF 50V NP0 0201"
C11 C12: library part CAP, "MLCC - SMD/SMT 0603 0.1uF 50volts X7R 10%"
C14: library part CAPACITOR, "CAP ALUM 100UF 35V 20% SMD"
C16 C23: library part Cap, "Capacitor, 3.9p, 0402, NP0, +-0.25pF, 50V"
C17 C18: library part Cap, "Capacitor, 220p, 0402, NP0, 5%, 50V"
C19: library part Cap, "Capacitor, 8.2p, 0402, NP0, +-0.25pF, 50V"
C20: library part Cap, "Capacitor, 5.6p, 0402, NP0, +-0.25pF, 50V"
C21 C22: library part Cap
C24: library part Cap, "Capacitor, 100n, 0402, X5R, 10%, 10V"
C25 C26 C27 C28 C29 C30 C31: library part Cap, "Capacitor, 22n, 0402, X7R, 10%, 25V"
C32: library part Cap, "CAP CER 12PF 50V 5% NP0 0402"
C33: library part Cap, "CAP CER 15PF 50V 5% NP0 0402"
C34: library part Cap, "CAP CER 0.1UF 50V 10% X7R 0603"
C35: library part Cap, "CAP CER 560PF 25V X7R 0201"
C36 C37 C40: library part Cap, "CAP ALUM POLY 270UF 20% 16V SMD"
C38: library part Cap, "1µF ±10% 50V Ceramic Capacitor X7R 0805 (2012 Metric)"
C39: library part Cap, "8200pF ±10% 16V Ceramic Capacitor X7R 0402 (1005 Metric)"
D1: library part DIODE_SCHOTTKY, "DIODE SCHOTTKY 30V 2A SMA"
D2: library part LED2, "LED BLUE DIFFUSED 0603 SMD"
D3: library part Diode, "Diode Small Signal Switching 100V 0.25A 2-Pin SOD-323 T/R"
D4: library part "TVS Diode", "TVS 20V 400 Watts"
D5: library part BiDi, "TVS DIODE 16VWM 39VC 2XDFN"
FB1 FB2: library part "Ferrite Bead", "FERRITE BEAD 48 OHM 2SMD 1LN"
L2 L4 L7: library part Inductor, "Inductor, 27n, 0402, ±5%"
L3: library part Inductor, "Inductor, 22n, 0402, ±5%"
L5: library part Inductor
L6: "Fixed Inductors 0.68uH"
L8: library part Inductor, "Fixed Inductors XAL5030 High Current 3.3 uH 20 % 8.1 A"
P1A P2A P4: library part "Header 6", "Header, 6-Pin"
P1B P2B P3: "Header, 6-Pin"
P5: library part "Header 4X2A", "Header, 4-Pin, Dual row"
Q1: "Trans GP BJT NPN 40V 0.6A 3-Pin SOT-23 T/R"
Q2: "BJT COMPOSITE TRANSISTOR GL WNG 2.9x2.8mm"
R4: library part Res1, "Thick Film Resistors - SMD 1/10watt 430ohms 1%"
R5 R6 R14 R16 R17 R22 R25: library part Res1, "RES SMD 1M OHM 5% 1/10W 0603"
R7 R8: library part Res1, "RES SMD 100K OHM 5% 1/10W 0603"
R9: library part Res1, "RES SMD 180 OHM 1% 1/10W 0402"
R10: library part Res1, "RES SMD 12 OHM 5% 1/2W 0805"
R11 R15: library part Resistor, "RES SMD 0.1 OHM 1% 1W 1206"
R12 R13 R18 R26: library part Res1, "Thick Film Resistors - SMD 0603 10Kohms 1% Tol"
R19: library part "Res Varistor", "Varistor (Voltage-Sensitive Resistor)"
R20 R21: library part Res1, "RES SMD 9.1M OHM 5% 1/10W 0603"
R23: library part Res1, "Thick Film Resistors - SMD 1/10watt 10ohms 1%"
R24: library part Res1, "Resistor, 56k ohms, 0402,  ±1%"
R27: library part Res1, "RES SMD 110 OHM 5% 1/10W 0603"
R28: library part Resistor, "20.5k Ohm ±1% 0.1W, 1/10W Chip Resistor 0603 (1608 Metric) Automotive AEC-Q200 Thick Film"
R29: library part Resistor, "RES SMD 150K OHM 1% 1/16W 0402"
R30: library part Res1, "RES SMD 10K OHM 1% 1/8W 0805"
S1 S2: "SWITCH DETECTOR SPST-NO 1MA 5V"
S3: library part "BMI-S-101 EMI Shield", "EMI SHIELD"
U2: "OP AMP - 2 CHANNEL"
U3: "IC MCU 8BIT 64KB FLASH 64TQFP"
U4 U5: library part MAX14870, "IC MOTOR DVR DC FULL BR 12TDFN"
U6: library part LMV1703T, "LDO Voltage Regulators 50mA 3.3V HI LDO"
U7: library part "ST3485ECDR Transceiver Half RS422,RS485", "Single Transmitter/Receiver RS-422/RS-485 8-Pin SO N T/R"
U8: library part CC1101, "IC RF VALUE LINE TXRX 20QFN"
U9: "Buck Switching Regulator IC Positive Adjustable 0.8V 1 Output 5A 8-PowerSOIC (0.154\", 3.90mm Width)"
XT2: "CRYSTAL 26MHZ 10PF SMD"

## Via types
v1: diameter 30, hole 15, Top Layer to Bottom Layer, tented both sides, 94 vias
v2: diameter 25, hole 15, Top Layer to Bottom Layer, 16 vias
v3: diameter 30, hole 15, Top Layer to Bottom Layer, tented bottom, 14 vias
v4: diameter 30, hole 15, Top Layer to Bottom Layer, 6 vias
v5: diameter 24, hole 12, Top Layer to Bottom Layer, 5 vias
v6: diameter 25.59, hole 11.81, Top Layer to Bottom Layer, tented both sides, 4 vias

## Nets (pads, with @x,y where several pads share a name; then routed paths per layer and width w, separated by ;. In a path a pad name is that pad's centre, name@x,y a point inside that pad or via, vN(x,y) a via of type N, cw(c..) or ccw(c..) an arc to the next point about the centre after c; other vN are vias at no path point)
DVCC: C25.2 C26.2 C27.2 C28.2 C29.2 C30.2 C31.2 R23.2 U8.4 U8.9 U8.11 U8.14 U8.15 U8.18 | length 1333.1
  Top Layer w10: R23.2@-895.27,-2350.44 -859.7,-2350.44 ccw(c-859.7,-2330.28) C30.2@-845.45,-2344.54 -834.58,-2333.67 cw(c-786.5,-2381.74) v1(-786.5,-2313.75) -781.57,-2308.82 cw(c-757.91,-2332.48) U8.11@-757.91,-2299.02 ; v1(-837.5,-2234.06) U8.9@-803.18,-2234.06 ; v1(-749.22,-2089.75) cw(c-775.78,-2116.31) -738.22,-2116.31 U8.4@-738.22,-2129.73 ; U8.14@-698.85,-2299.02 U8.15@-679.17,-2299.02 cw(c-679.17,-2333.86) -654.53,-2309.22 v1(-650,-2313.75) ; U8.18@-633.89,-2214.37 -602.33,-2214.37 ccw(c-602.33,-2207.54) v1(-597.5,-2212.37)
  Bottom Layer w10: C31.2@-859.85,-2246.75 ccw(c-719.19,-2214.67) -819.7,-2318.17 ccw(c-719.19,-2214.67) C29.2@-782.01,-2344.54 ; v1(-837.5,-2234.06) ccw(c-837.5,-2257.43) -854.03,-2240.9 C31.2@-859.88,-2246.75 cw(c-719.19,-2214.67) -766.12,-2078.25 cw(c-766.12,-2088.85) -758.62,-2081.35 v1@-749.72,-2090.25 ; v1(-786.5,-2313.75) -786.5,-2333.4 ccw(c-770.44,-2333.4) C29.2@-782.01,-2344.54 ; C29.2@-781.8,-2344.76 cw(c-770.44,-2333.4) C29.2@-782.01,-2344.54 ; C28.2@-719.19,-2070.33 -719.27,-2070.4 cw(c-719.19,-2214.67) C27.2@-578.5,-2246.6 ; v1(-650,-2313.75) -650,-2328.66 cw(c-672.64,-2328.66) -656.63,-2344.67 ; v1(-597.5,-2212.37) -589.38,-2220.5 cw(c-615.63,-2246.75) C27.2@-578.5,-2246.6 ; C29.2@-782.01,-2344.54 ccw(c-719.19,-2214.67) -656.63,-2344.67 ; -656.63,-2344.67 ccw(c-719.19,-2214.67) -656.38,-2344.55 ccw(c-719.19,-2214.67) C27.2@-578.5,-2246.6 ; C27.2@-578.5,-2246.6 cw(c-615.63,-2246.75) C27.2@-578.5,-2246.75 ccw(c-610.81,-2246.75) C27.2@-578.5,-2246.6
GND: B-1.1 C6.1 C7.1 C8.1 C9.1 C10.1 C11.1 C12.1 C13.2 C14.2 C15.1 C18.1 C19.2 C20.2 C21.2 C22.2 C23.2 C24.1 C25.1 C26.1 C27.1 C28.1 C29.1 C30.1 C31.1 C32.1 C33.1 D4.1 D5.1 FB2.2 L6.1 P3.3 Q2.1 Q2.4 R4.2 R7.2 R8.2 R10.1 R11.2 R15.2 R18.1 R21.2 R22.2 R24.2 R26.2 S1.2 S1.3 S2.2 S2.3 U2.4 U3.9 U3.41 U4.0 U4.4 U4.9 U5.0 U5.4 U5.9 U6.2 U7.5 U8.16 U8.19 U8.21 | length 518.4
  Top Layer w8: U8.21@-691.92,-2240.99 v5(-718.54,-2214.37) cw(c-671.01,-2261.9) -671.01,-2194.69 U8.19@-633.89,-2194.69 ; v5(-689.01,-2243.9) -691.9,-2241.01 ccw(c-660.51,-2209.58) -660.51,-2254 -634.15,-2254 U8.16@-633.89,-2253.74
  Top Layer w10: U4.0@-1394.54,-859.96 U4.0@-1394.54,-859.81
  Top Layer w15: v2@-1503.31,-2379.95 v2@-1502.4,-2379.95 ; v2@-1502.47,-2380.02 v2@-1502.4,-2379.95 ; C12.1@-1410.62,-2379.95 v2(-1501.79,-2379.95) v2@-1502.4,-2379.95 ; U4.0@-1394.54,-859.81 R11.2@-1394.54,-797.78 ; R7.2@-1271.18,-1446 R8.2@-1208.91,-1383.73
  Bottom Layer w15: C11.1@-1394.54,-777.78 -1394.54,-841.21 -1394.54,-859.24 v2@-1394.07,-859.71
  other v1: -349.99,-2946 -636.17,-2688 -91.73,-2688 -1236.34,-2600.52 -1097.61,-2600.52 -894,-2600.52 -1386.89,-2539 -636.17,-2489.73 -625.38,-2282.22 -1403.64,-2193.47 -528.91,-2193.47 -650.18,-2138.66 -1403.64,-2031 -1010,-1990.96 -640.78,-1920.12 -1367.3,-1892.25 -179.18,-1846 -1197,-1838.71 -418.18,-1747.02 -800.43,-1696 -1516,-1554.29 -177,-1543.88 -126.68,-1041 -1649.65,-903 -448.43,-848.11 -919,-760 -686.39,-760 -1649.65,-545.56 -126.68,-543.09 -1112,-466 -1493.2,-295.13 -1326.79,-295.13
  other v2: -1554.29,-2398.95 -1484.29,-2398.95 -1519.29,-2394.95 -1536.79,-2379.95 -1519.29,-2364.95 -1554.29,-2360.95 -1484.29,-2360.95 -1413.07,-911.21 -1375.07,-911.21 -1394.07,-893.71 -1409.07,-876.21 -1379.07,-876.21 -1394.07,-858.71 -1413.07,-841.21 -1375.07,-841.21
  other v5: -748.07,-2243.9 -748.07,-2184.84 -689.01,-2184.84
NetAnt1_1: Ant1.1 C22.1 D5.2 L5.2 L6.2 | length 210.7
  Top Layer w6: L6.2@-727.5,-3014.84 Ant1.1@-727.5,-2958.95 ; L5.2@-727.5,-2861.44 C22.1@-727.5,-2899.13 Ant1.1@-727.5,-2958.95 ; D5.2@-670.24,-2958.95 Ant1.1@-727.5,-2958.95
NetB1_2: B1.2 D3.1 Q1.1 | length 212.3
  Bottom Layer w10: B1.2@-1340.12,-1821.26 cw(c-1277.44,-1883.93) -1277.44,-1795.3 D3.1@-1235.7,-1795.3 -1138.95,-1795.3 Q1.1@-1136,-1798.25
NetBAT_0: BAT.0 R20.2 R22.1 U3.24 | length 1526.6
  Top Layer w10: v1(-1177.76,-919.38) ccw(c-1196.48,-900.66) -1170,-900.66 -1170,-843 cw(c-1132.87,-843) -1159.13,-816.75 R22.1@-1128,-785.63 R20.2@-1128,-727.62 ; U3.24@-839.25,-1924.93 -839.25,-1642.47 cw(c-764.9,-1642.47) -817.48,-1589.9 -796.08,-1568.51 ccw(c-815.59,-1549) v1(-788,-1549)
  Signal Layer 1 w10: v1(-1177.76,-919.38) -977.14,-919.38 cw(c-977.14,-1019.38) -906.43,-948.67 -817.29,-1037.81 cw(c-888,-1108.52) -788,-1108.52 v1(-788,-1549)
NetC1_1: C1.1 C35.1 C36.1 C37.1 C40.1 FB1.1 L8.2 R29.2 | length 230.8
  Bottom Layer w25: R29.2@-1058.42,-1058.73 v1(-1058.42,-1029.65) C35.1@-1058.42,-1000.56 v1(-1058.42,-969) L8.2@-1058.42,-827.92
NetC1_2: C1.2 C36.2 C37.2 C38.2 C39.2 C40.2 D1.1 FB2.1 P5.7 P5.8 R28.1 R30.1 S3.1 U9.7 U9.9 | length 194.3
  Bottom Layer w15: C39.2@-1062.1,-1201.73 -994.19,-1201.73 U9.7@-992.19,-1199.74 -904,-1199.74 U9.9@-879,-1224.74
  other v4: -904.59,-1275.92 -853.41,-1275.92 -904.59,-1224.74 -853.41,-1224.74 -904.59,-1173.55 -853.41,-1173.55
NetC8_2: C8.2 U3.40 XT1.2 | length 230.4
  Top Layer w8: U3.40@-605,-1710.36 -584.61,-1710.36 ccw(c-584.61,-1610.36) -513.9,-1681.08 -469.96,-1637.13 cw(c-439.73,-1667.36) -439.73,-1624.61 XT1.2@-403.94,-1624.61
NetC9_2: C9.2 U3.39 XT1.1 | length 230.4
  Top Layer w8: U3.39@-605,-1730.05 -584.61,-1730.05 cw(c-584.61,-1830.05) -513.9,-1759.34 -469.96,-1803.28 ccw(c-439.73,-1773.05) -439.73,-1815.8 XT1.1@-403.94,-1815.8
NetC10_2: C10.2 R12.1 R13.2 | length 103.6
  Top Layer w10: R13.2@-438.23,-684.2 C10.2@-438.23,-729.77 R12.1@-380.22,-729.77
NetC16_1: C16.1 L3.1 L7.2 | length 82.1
  Top Layer w6: C16.1@-748.79,-2428.28 -736.32,-2440.74 cw(c-757.62,-2462.04) L3.1@-727.5,-2462.04 cw(c-695.13,-2462.04) -718.03,-2439.15 L7.2@-707.15,-2428.28
NetC16_2: C16.2 L2.2 U8.12 | length 88.8
  Top Layer w6: C16.2@-748.79,-2384.98 ccw(c-758.29,-2375.47) -744.85,-2375.47 L2.2@-744.85,-2347.28 ccw(c-760.84,-2331.28) -738.22,-2331.28 U8.12@-738.22,-2299.02
NetC17_1: C17.1 C20.1 L4.2 | length 75.4
  Top Layer w6: C17.1@-727.5,-2699.43 C20.1@-727.5,-2661.74 L4.2@-727.5,-2624.04
NetC17_2: C17.2 C21.1 L5.1 | length 75.4
  Top Layer w6: L5.1@-727.5,-2818.13 C21.1@-727.5,-2780.44 C17.2@-727.5,-2742.74
NetC18_2: C18.2 L2.1 | length 38.3
  Top Layer w10: C18.2@-790.42,-2384.98 -790.42,-2352.74 cw(c-782.69,-2352.74) L2.1@-788.16,-2347.28
NetC19_1: C19.1 L3.2 L4.1 | length 75.4
  Top Layer w6: L4.1@-727.5,-2580.74 C19.1@-727.5,-2543.04 L3.2@-727.5,-2505.35
NetC23_1: C23.1 L7.1 U8.13 | length 89
  Top Layer w6: U8.13@-718.54,-2299.02 -718.54,-2329.3 ccw(c-693.11,-2329.3) C23.1@-711.09,-2347.28 -711.09,-2375.47 ccw(c-697.65,-2375.47) L7.1@-707.15,-2384.98
NetC24_2: C24.2 U8.5 | length 109.9
  Top Layer w10: v1(-780,-2052.09) -780,-2076.39 ccw(c-704.57,-2076.39) U8.5@-757.91,-2129.73
  Bottom Layer w10: C24.2@-806.35,-2052.09 v1(-780,-2052.09)
NetC32_2: C32.2 U8.10 XT2.1 | length 193.5
  Top Layer w10: C32.2@-962.59,-2337.78 XT2.1@-940.17,-2308.43 ; XT2.1@-936.28,-2287.59 -930.45,-2293.42 ccw(c-898.44,-2261.4) -898.44,-2306.68 ccw(c-898.44,-2269.51) -872.16,-2295.79 -849.15,-2272.78 cw(c-803.18,-2318.75) U8.10@-803.18,-2253.74
NetC33_2: C33.2 U8.8 XT2.3 | length 193.5
  Top Layer w10: C33.2@-965.7,-2136.58 XT2.3@-936.36,-2159 ; XT2.3@-936.28,-2180.52 -930.45,-2174.7 cw(c-898.44,-2206.71) -898.44,-2161.44 cw(c-898.44,-2198.61) -872.16,-2172.33 -849.15,-2195.33 ccw(c-803.18,-2149.37) U8.8@-803.18,-2214.37
NetC34_1: C34.1 D1.2 L8.1 U9.8 | length 877.2
  Bottom Layer w25: U9.8@-992.19,-1149.74 -943.19,-1100.73 -787,-1100.73 -735,-1048.73 -683.43,-1048.73 C34.1@-677.58,-1054.58 ; L8.1@-806.76,-796.73 -677.58,-925.92 C34.1@-677.58,-1054.58 ; D1.2@-562,-931 -562,-999.73 -616.84,-1054.58 C34.1@-677.58,-1054.58
NetC34_2: C34.2 U9.1 | length 94.5
  Bottom Layer w10: U9.1@-765.81,-1149.74 -692.74,-1149.74 C34.2@-677.58,-1134.58
NetC35_2: C35.2 R29.1 R30.2 U9.5 | length 567.2
  Bottom Layer w10: R29.1@-998.42,-1052.73 -992.42,-1052.73 -951.18,-1052.73 R30.2@-923,-1024.56
  Bottom Layer w25: R29.1@-998.42,-1052.73 C35.2@-998.42,-1000.56 ; R29.1@-992.42,-1058.73 -992.42,-1087.42 -1013,-1108 -1078.65,-1108 -1105,-1134.35 -1105,-1281 -1086.26,-1299.74 U9.5@-992.19,-1299.74
NetC38_1: C38.1 P5.4 P5.5 U9.2 U9.3
NetC39_1: C39.1 U9.6 | length 71.9
  Bottom Layer w10: C39.1@-1062.1,-1245.04 -996.88,-1245.04 U9.6@-992.19,-1249.74
NetCS1_0: CS1.0 U3.36 U8.7 | length 687.6
  Top Layer w10: v3(-877.06,-2004.43) -877.06,-2105.1 ccw(c-789.36,-2105.1) -851.37,-2167.11 -838.37,-2180.11 ccw(c-803.18,-2144.93) U8.7@-803.18,-2194.69 U8.7@-810.71,-2194.69 ; v1(-675.2,-1790) -607.16,-1790 ccw(c-607.16,-1786.94) U3.36@-605,-1789.11
  Bottom Layer w10: v3(-877.06,-2004.43) -877.06,-1880.24 cw(c-777.06,-1880.24) -847.77,-1809.53 cw(c-790.97,-1866.33) -790.97,-1786 -684.85,-1786 cw(c-684.85,-1799.66) v1(-675.2,-1790)
NetCS2_0: CS2.0 P4.2 U3.52 | length 1187.9
  Top Layer w8: U3.52@-740.83,-1476.11 -740.83,-1448.77 cw(c-724.35,-1448.77) -736,-1437.12 cw(c-728.48,-1444.64) -728.48,-1434 -672.19,-1434 cw(c-672.19,-1471.05) -645.99,-1444.85 -633.51,-1457.32 ccw(c-614.98,-1438.8) -614.98,-1465 -582.26,-1465 ccw(c-582.26,-1432.73) -559.45,-1455.55 ccw(c-583,-1432) v3(-549.69,-1432)
  Signal Layer 1 w10: v3(-549.69,-1432) -549.69,-680.1 cw(c-489.28,-680.1) -532,-637.38 -522.54,-627.93 ccw(c-593.25,-557.22) -493.25,-557.22 P4.2@-493.25,-517
NetD2_1: D2.1 U3.61 | length 1530.9
  Top Layer w10: U3.61@-917.99,-1476.11 ccw(c-920.39,-1473.72) -917,-1473.72 -917,-1422.34 cw(c-899.59,-1422.34) -911.9,-1410.03 cw(c-885.28,-1436.65) -885.28,-1399 -868.76,-1399 -177.75,-1399 cw(c-177.75,-1494.98) -109.89,-1427.11 -94.29,-1442.71 cw(c-165,-1513.42) -65,-1513.42 -65,-1872.5 cw(c-89.1,-1872.5) -72.06,-1889.54 cw(c-109.47,-1852.13) -109.47,-1905.04 D2.1@-240,-1905.04
NetD2_2: D2.2 R4.1 | length 58.2
  Top Layer w10: R4.1@-300.56,-1847.03 cw(c-301.91,-1848.38) -300,-1848.38 D2.2@-300,-1905.04
NetDOWN_0: DOWN.0 R16.2 S2.0 S2.1 U3.60 | length 1007.9
  Top Layer w10: U3.60@-898.31,-1476.11 -898,-1476.42 v1(-898,-1574.2)
  Bottom Layer w10: S2.0@-1614.87,-1221.32 -1569.36,-1266.84 ccw(c-1498.65,-1196.13) -1498.65,-1296.13 S2.1@-1463.3,-1296.13 R16.2@-1463.3,-1389.6 ccw(c-1397.88,-1389.6) -1444.14,-1435.86 -1435.66,-1444.34 ccw(c-1364.95,-1373.63) -1364.95,-1473.63 -1207.5,-1473.63 cw(c-1207.5,-1526.11) -1170.4,-1488.99 ; -1170.4,-1489 -1157.47,-1501.92 ccw(c-1108,-1452.45) -1108,-1522.41 -1019.89,-1522.41 cw(c-1019.89,-1622.41) -949.17,-1551.7 -946.95,-1553.93 ccw(c-898,-1504.98) v1(-898,-1574.2)
NetGDO0_0: GDO0.0 U3.30 U8.6 | length 439.6
  Top Layer w10: v3(-828.06,-2004.43) -828.06,-2114.95 ccw(c-743.14,-2114.95) U8.6@-803.18,-2175 ; v1(-799,-1872) -738.5,-1872 cw(c-738.5,-1885.66) -728.84,-1876 cw(c-747.42,-1894.58) -721.14,-1894.58 U3.30@-721.14,-1924.93
  Signal Layer 1 w10: v3(-828.06,-2004.43) -828.06,-1942.15 cw(c-728.85,-1942.15) v1(-799,-1872)
NetGDO2_0: GDO2.0 U3.29 U8.3 | length 224.3
  Top Layer w10: U3.29@-740.83,-1924.93 -740.83,-1960.83 cw(c-755.3,-1960.83) -745.06,-1971.07 ccw(c-706.59,-2009.54) -761,-2009.54 v3(-761,-2015.05) ccw(c-719.2,-2015.05) -748.76,-2044.61 -730.02,-2063.34 cw(c-757.74,-2091.07) -718.54,-2091.07 U8.3@-718.54,-2129.73
NetM1_0: M1.0 R5.1 U2.1 U3.23 | length 1080.2
  Top Layer w10: U2.1@-1416,-1454.7 -1410.73,-1449.43 cw(c-1380,-1480.16) v1(-1380,-1436.7) -1357.45,-1436.7 cw(c-1357.45,-1468.45) R5.1@-1335,-1446 ; U3.23@-858.94,-1924.93 -859,-1924.87 -858,-1923.87 v1(-858,-1579)
  Signal Layer 1 w10: v1(-1380,-1436.7) -907.77,-1436.7 cw(c-907.77,-1492.35) -868.42,-1453 cw(c-893.58,-1478.16) -858,-1478.16 v1(-858,-1579)
NetM1_DIR_0: M1_DIR.0 U3.3 U4.6 | length 1325.4
  Top Layer w10: v1(-1628,-1472) -1628,-1554.86 ccw(c-1593.86,-1554.86) -1618,-1579 ccw(c-1601.1,-1562.1) -1601.1,-1586 -1251.83,-1586 cw(c-1251.83,-1592.83) -1247,-1588 ccw(c-1236.73,-1577.73) -1236.73,-1592.26 U3.3@-1053.82,-1592.25 ; v1(-1530,-939) -1485.46,-939 ccw(c-1485.46,-893.19) U4.6@-1453.07,-925.58
  Signal Layer 1 w10: v1(-1628,-1472) -1628,-1095.39 cw(c-1534.83,-1095.39) -1600.71,-1029.51 -1544,-972.8 ccw(c-1577.81,-939) v1(-1530,-939)
NetM1_EN_0: M1_EN.0 U3.20 U4.8 | length 2089.6
  Top Layer w10: U4.8@-1335,-905.74 v1(-1295.56,-905.74) ; v1(-1331,-2076) -1008.07,-2076 ccw(c-1008.07,-1976) -937.36,-2046.71 ccw(c-984.1,-1999.96) -917.99,-1999.96 U3.20@-917.99,-1924.93
  Signal Layer 1 w10: v1(-1331,-2076) -1489.3,-2076 cw(c-1489.3,-2004.3) -1540,-2055 cw(c-1485.5,-2000.5) -1562.58,-2000.5 -1562.58,-1121.75 cw(c-1462.58,-1121.75) -1533.29,-1051.04 -1480.54,-998.29 cw(c-1409.83,-1069) -1409.83,-969 -1400.25,-969 ccw(c-1400.25,-869) -1329.54,-939.71 v1(-1295.56,-905.74)
NetM1_ID_0: M1_ID.0 Q2.6 R17.1 U3.44 | length 1010.9
  Top Layer w10: U3.44@-605,-1631.62 -590.11,-1631.62 ccw(c-590.11,-1531.62) -547.94,-1622.3 ccw(c-590.11,-1531.62) -519.4,-1602.34 -404.35,-1487.29 cw(c-333.64,-1558) -333.64,-1458 -304.6,-1458 cw(c-304.6,-1534.29) -250.65,-1480.34 ccw(c-233.6,-1463.29) Q2.6@-233.6,-1487.41 -122.86,-1487.41 cw(c-122.86,-1523.81) -97.12,-1498.07 cw(c-131.21,-1532.16) -83,-1532.16 -83,-1744.93 cw(c-114.56,-1744.93) -92.24,-1767.24 cw(c-144.82,-1714.67) -144.82,-1789.02 R17.1@-240,-1789.02